# Altium PCB HItachi (unroute).PcbDoc
Units mm, origin at the board's own origin, x right, y up, seen from the top; angles counter-clockwise.
Board outline 140 x 102 mm, 4 copper layers (TOP, GND, POWER, BOT), stack 0.778 mm thick; 39 components, 47 nets, 150 pads, 0 vias.
Unrouted connection lines stored in the file: 103.
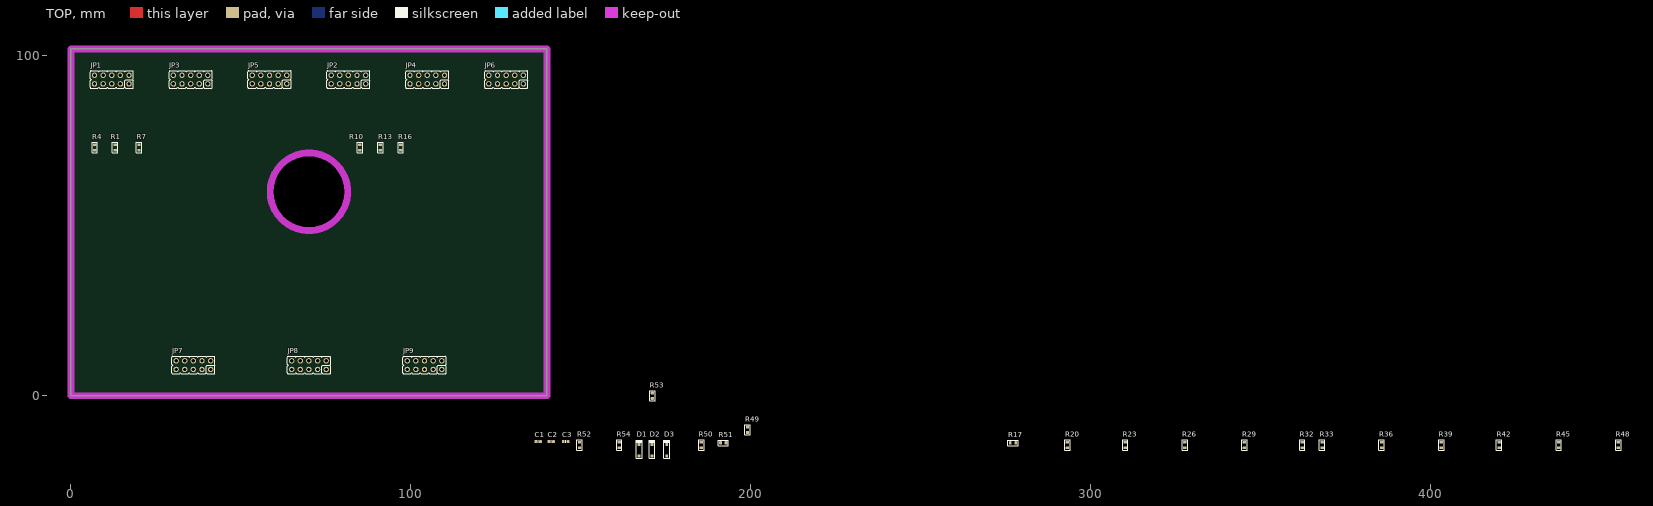
[diagram p0: TOP view]
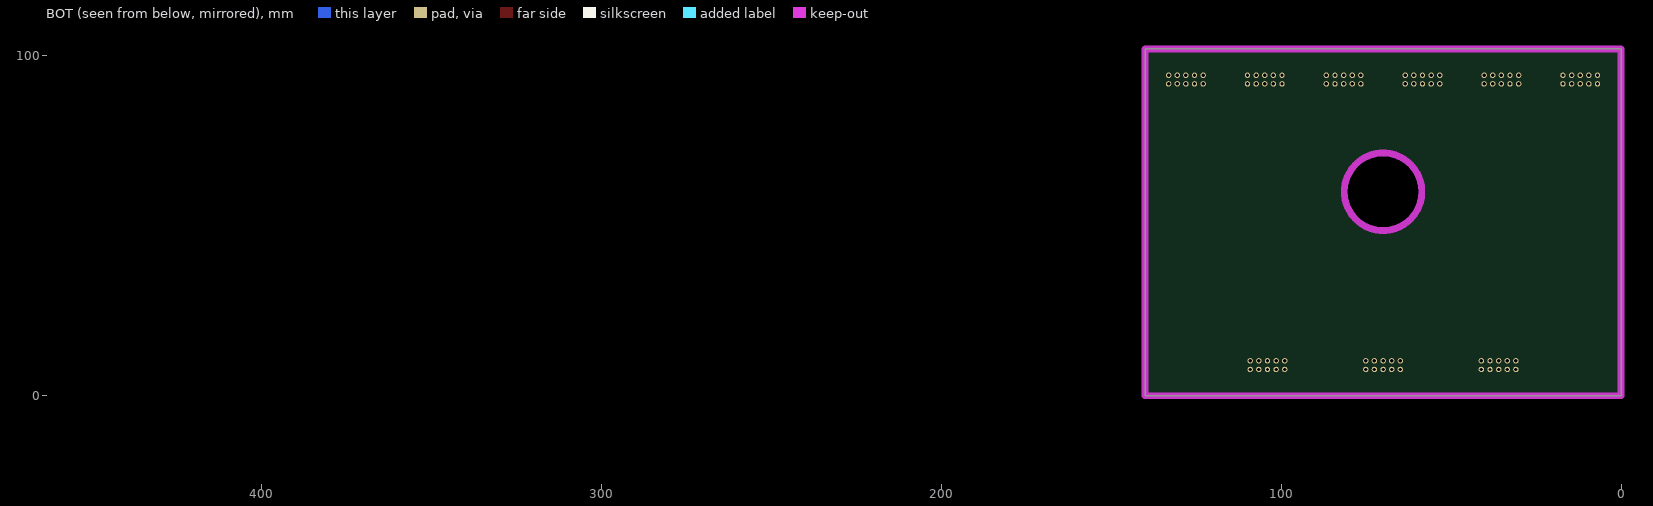
[diagram p1: BOT view, seen from below]
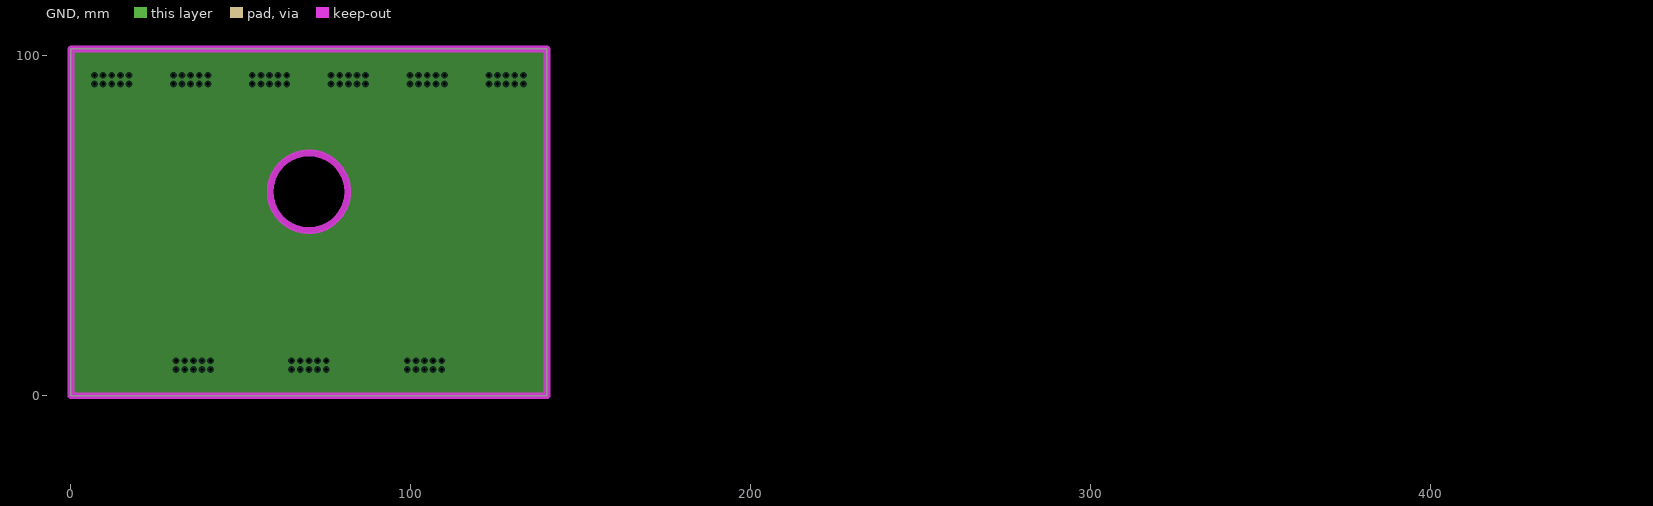
[diagram p2: GND, clearances drawn from the general rule]

## Layer stack, top to bottom
Top Solder: solder mask 0.0102, Solder Resist, Dk 3.5
TOP: signal copper 0.0356
Dielectric 1: core 0.254, FR-4, Dk 4.2
GND: plane copper 0.036
Dielectric 3: prepreg 0.127, Dk 4.2
POWER: signal copper 0.036
Dielectric 2: core 0.254, Dk 4.2
BOT: signal copper 0.0356
Bottom Solder: solder mask 0.0102, Solder Resist, Dk 3.5

## Board outline
0,0 0,102 140,102 140,0
cut-out: 58.598,60 ccw(c70,60) 70,48.598 ccw(c70,60) 81.402,60 ccw(c70,60) 70,71.402 ccw(c70,60)

## Design rules (kind name [scope] priority, off if disabled: settings)
Clearance [All] p1: gap=0.254 ignorepadtopadclearanceinfootprint=FALSE except(0: Arc-Hole Track-Hole SMDPad-Hole THPad-Hole Via-Hole Fill-Hole Poly-Hole Region-Hole Text-Hole)
MatchedLengths [All] p1: tolerance=2 checknetsindiffpair=FALSE checkdiffpairvsdiffpair=TRUE checkxsignals=TRUE checkothers=TRUE
PlaneClearance [All] p1: clearance=0.508
PlaneConnect [All] p1: planeconnectstyle=Relief reliefexpansion=0.508 reliefentries=4 reliefconductorwidth=0.254 reliefairgap=0.254
PolygonConnect [All] p1: connectstyle=Relief reliefconductorwidth=0.254 reliefentries=4 polygonreliefangle="90 Angle" airgapwidth=0.254
RoutingVias [All] p1: holewidth=0.711 width=1.27 viastyle="Through Hole" minholewidth=0.711 minwidth=1.27 maxholewidth=0.711 maxwidth=1.27
SolderMaskExpansion [All] p1: expansion=0.102 istentingtop=FALSE
Width [All] p1: maxlimit=0.5 minlimit=0.3 preferedwidth=0.3
28 further rules are at their usual default settings.

## Classes and differential pairs
net class NETPxx: P11 P12 P14 P15 P17 P18 P21 P22 P24 P25 P27 P28 P31 P32 P34 P35 P37 P38

## Components (designator, comment, footprint, x,y, rotation, side; value= is the part's Value field where it differs from the comment)
C1 "5AK102KABAA" C0603 137.406,-13.503 r0 top
C2 "5AK102KABAA" C0603 141.216,-13.503 r0 top
C3 "5AK102KABAA" C0603 145.534,-13.503 r0 top
D1 "1N4148_SMD" 1N4148W_V_SMD 167.124,-16.043 r90 top
D2 "1N4148_SMD" 1N4148W_V_SMD 170.934,-16.043 r90 top
D3 "1N4148_SMD" 1N4148W_V_SMD 175.252,-16.043 r90 top
JP1 "SIGNAL OUT 1" HeaderSP_5x2 12,93 r180 top
JP2 "SIGNAL OUT 2" HeaderSP_5x2 81.6,93 r180 top
JP3 "SIGNAL OUT 3" HeaderSP_5x2 35.2,93 r180 top
JP4 "SIGNAL OUT 4" HeaderSP_5x2 104.8,93 r180 top
JP5 "SIGNAL OUT 5" HeaderSP_5x2 58.4,93 r180 top
JP6 "SIGNAL OUT 6" HeaderSP_5x2 128,93 r180 top
JP7 "SIGNAL IN 1" HeaderSP_5x2 36,9 r180 top
JP8 "SIGNAL IN 2" HeaderSP_5x2 70,9 r180 top
JP9 "SIGNAL IN 3" HeaderSP_5x2 104,9 r180 top
R1 "CF1/4W1KJ25" "RM06JTN (0603)" 13,73 r90 top
R4 "CF1/4W1KJ25" "RM06JTN (0603)" 7,73 r90 top
R7 "CF1/4W1KJ25" "RM06JTN (0603)" 20,73 r90 top
R10 "CF1/4W1KJ25" "RM06JTN (0603)" 85,73 r90 top
R13 "CF1/4W1KJ25" "RM06JTN (0603)" 91,73 r90 top
R16 "CF1/4W1KJ25" "RM06JTN (0603)" 97,73 r90 top
R17 "CF1/4W1KJ25" "RM06JTN (0603)" 277.106,-13.884 r0 top
R20 "CF1/4W1KJ25" "RM06JTN (0603)" 293.108,-14.519 r90 top
R23 "CF1/4W1KJ25" "RM06JTN (0603)" 310.126,-14.519 r90 top
R26 "CF1/4W1KJ25" "RM06JTN (0603)" 327.652,-14.519 r90 top
R29 "CF1/4W1KJ25" "RM06JTN (0603)" 345.178,-14.519 r90 top
R32 "CF1/4W1KJ25" "RM06JTN (0603)" 362.196,-14.519 r90 top
R33 "CF1/4W1KJ25" "RM06JTN (0603)" 368.038,-14.519 r90 top
R36 "CF1/4W1KJ25" "RM06JTN (0603)" 385.564,-14.519 r90 top
R39 "CF1/4W1KJ25" "RM06JTN (0603)" 403.09,-14.519 r90 top
R42 "CF1/4W1KJ25" "RM06JTN (0603)" 420.108,-14.519 r90 top
R45 "CF1/4W1KJ25" "RM06JTN (0603)" 437.634,-14.519 r90 top
R48 "CF1/4W1KJ25" "RM06JTN (0603)" 455.16,-14.519 r90 top
R49 "CF1/4W1KJ25" "RM06JTN (0603)" 199,-10 r90 top
R50 "CF1/4W1KJ25" "RM06JTN (0603)" 185.412,-14.519 r90 top
R51 "CF1/4W1KJ25" "RM06JTN (0603)" 191.889,-13.884 r0 top
R52 "CF1/4W1KJ25" "RM06JTN (0603)" 149.598,-14.519 r90 top
R53 "CF1/4W1KJ25" "RM06JTN (0603)" 171,0 r90 top
R54 "CF1/4W1KJ25" "RM06JTN (0603)" 161.282,-14.519 r90 top

## Footprints (in the part's own frame and the unit in brackets; to place one, negate y for a bottom-side part, rotate by r counter-clockwise, add the part's x,y. Pads: shape width x height; smd on the part's side, far side on the other; paste and mask are expansions set on the pad)
1N4148W_V_SMD [mm] "SOD-123"
  rrect20% 0.85x0.85 smd mask+0.1: 1(-1.675,0) 2(1.675,0)
  silkscreen extent -2.4,-0.85 3,0.85, body extent -1.85,-0.8 1.85,0.8, height 1.27
C0603 [mm] "Chip Capacitor, Body 1.6x0.8mm, 1608"
  rrect50% 0.8x0.9 smd: 1(-0.7,0) 2(0.7,0)
  silkscreen extent 0,-0.4 0,0.4, body extent -0.8,-0.4 0.8,0.4, height 0.6
HeaderSP_5x2 [mm] "Connector DIP FeMale, 2x5Pin_2.54mm"
  round 1.6 hole 1 mask+0.1: 1(-5.08,1.27) 2(-2.54,1.27) 3(0,1.27) 4(2.54,1.27) 5(5.08,1.27) 6(-5.08,-1.27) 7(-2.54,-1.27) 8(0,-1.27) 9(2.54,-1.27) 10(5.08,-1.27)
  silkscreen extent -6.35,-2.55 6.35,2.55
"RM06JTN (0603)" [mm] "RESISTOR_1/10W_SMD"
  rrect50% 0.8x1 smd mask+0.1: 1(-0.8,0) 2(0.8,0)
  silkscreen extent -1.5,-0.8 1.5,0.8, body extent -0.8,-0.41 0.8,0.41, height 0.45

## Part data
C1 C2 C3: "CAP NPO CAPNTO 1nF 100V 10%"
D1 D2 D3: "Diode HS 500mA 100V SOD123"
JP1 JP2 JP3 JP4 JP5 JP6 JP7 JP8 JP9: library part Con10, "Connector 10"
R1 R4 R7 R10 R13 R16 R17 R20 R23 R26 R29 R32 R33 R36 R39 R42 R45 R48 R49 R50 R51 R52 R53 R54: "RES CF AXIAL-0.3 5% 1/4W 1K"

## Nets (pads, with @x,y where several pads share a name; then routed paths per layer and width w, separated by ;. In a path a pad name is that pad's centre, name@x,y a point inside that pad or via, vN(x,y) a via of type N, cw(c..) or ccw(c..) an arc to the next point about the centre after c; other vN are vias at no path point)
7.2V: C1.1 C2.1 C3.1 JP2.1 JP4.1 JP6.1 JP7.10 JP8.10 JP9.10 R52.1 R53.1 R54.1
GND: JP1.3 JP1.4 JP1.6 JP1.7 JP1.9 JP1.10 JP2.2 JP2.4 JP2.5 JP2.7 JP2.8 JP2.10 JP3.3 JP3.4 JP3.6 JP3.7 JP3.9 JP3.10 JP4.2 JP4.4 JP4.5 JP4.7 JP4.8 JP4.10 JP5.3 JP5.4 JP5.6 JP5.7 JP5.9 JP5.10 JP6.2 JP6.4 JP6.5 JP6.7 JP6.8 JP6.10 JP7.1 JP7.4 JP7.7 JP8.1 JP8.4 JP8.7 JP9.1 JP9.4 JP9.7
NetC1_2: C1.2 D1.2
NetC2_2: C2.2 D2.2
NetC3_2: C3.2 D3.2
NetD1_1: D1.1 R49.1 R52.2
NetD2_1: D2.1 R50.1 R53.2
NetD3_1: D3.1 R51.1 R54.2
NetJP1_1: JP1.1 R49.2
NetJP1_2: JP1.2 R1.2
NetJP1_5: JP1.5 R4.2
NetJP1_8: JP1.8 R7.2
NetJP2_3: JP2.3 R10.2
NetJP2_6: JP2.6 R13.2
NetJP2_9: JP2.9 R16.2
NetJP3_1: JP3.1 R50.2
NetJP3_2: JP3.2 R17.2
NetJP3_5: JP3.5 R20.2
NetJP3_8: JP3.8 R23.2
NetJP4_3: JP4.3 R26.2
NetJP4_6: JP4.6 R29.2
NetJP4_9: JP4.9 R32.2
NetJP5_1: JP5.1 R51.2
NetJP5_2: JP5.2 R33.2
NetJP5_5: JP5.5 R36.2
NetJP5_8: JP5.8 R39.2
NetJP6_3: JP6.3 R42.2
NetJP6_6: JP6.6 R45.2
NetJP6_9: JP6.9 R48.2
P11: JP7.9 R1.1
P12: JP7.8 R10.1
P14: JP7.6 R4.1
P15: JP7.5 R13.1
P17: JP7.3 R7.1
P18: JP7.2 R16.1
P21: JP8.9 R17.1
P22: JP8.8 R26.1
P24: JP8.6 R20.1
P25: JP8.5 R29.1
P27: JP8.3 R23.1
P28: JP8.2 R32.1
P31: JP9.9 R33.1
P32: JP9.8 R42.1
P34: JP9.6 R36.1
P35: JP9.5 R45.1
P37: JP9.3 R39.1
P38: JP9.2 R48.1

## Polygon pours and split planes (outlines as drawn)
no net on GND (split plane): 139.49,0.51 0.51,0.51 0.51,101.49 139.49,101.49

## Keep-outs
Keep-Out Layer:
  circle w2: c70,60 r11.402
  lines w2: 0,0 140,0 140,102 0,102 0,0

## Dimensions
70,60 to 69.596,59.436 on Mechanical 10
70,71.402 to 0,102 on Mechanical 10
58.598,60 to 0,102 on Mechanical 10
0,102 to 140,102 on Mechanical 10
0,102 to 0,0 on Mechanical 10
0,102 to 6.92,94.27 on Mechanical 10
140,102 to 133.08,94.27 on Mechanical 10
0,102 to 6.92,94.27 on Mechanical 10
140,102 to 133.08,94.27 on Mechanical 10
0,0 to 30.92,7.73 on Mechanical 10
0,0 to 30.92,7.73 on Mechanical 10
109.08,7.73 to 140,0 on Mechanical 10
109.08,7.73 to 140,0 on Mechanical 10

## Text inside footprints (layer, text, board x,y; h text height)
C1: Mechanical 1 "C?" at 137.406,-13.503 h0.5
C2: Mechanical 1 "C?" at 141.216,-13.503 h0.5
C3: Mechanical 1 "C?" at 145.534,-13.503 h0.5
JP1: Mechanical 1 "1" at 17.25,92.13 h1.2 r180; Mechanical 1 "5" at 7.2,92.1 h1.2 r180; Mechanical 1 "10" at 7.45,94.67 h1.2 r180; Mechanical 1 "6" at 17.25,94.67 h1.2 r180
JP2: Mechanical 1 "1" at 86.85,92.13 h1.2 r180; Mechanical 1 "5" at 76.8,92.1 h1.2 r180; Mechanical 1 "10" at 77.05,94.67 h1.2 r180; Mechanical 1 "6" at 86.85,94.67 h1.2 r180
JP3: Mechanical 1 "1" at 40.45,92.13 h1.2 r180; Mechanical 1 "5" at 30.4,92.1 h1.2 r180; Mechanical 1 "10" at 30.65,94.67 h1.2 r180; Mechanical 1 "6" at 40.45,94.67 h1.2 r180
JP4: Mechanical 1 "1" at 110.05,92.13 h1.2 r180; Mechanical 1 "5" at 100,92.1 h1.2 r180; Mechanical 1 "10" at 100.25,94.67 h1.2 r180; Mechanical 1 "6" at 110.05,94.67 h1.2 r180
JP5: Mechanical 1 "1" at 63.65,92.13 h1.2 r180; Mechanical 1 "5" at 53.6,92.1 h1.2 r180; Mechanical 1 "10" at 53.85,94.67 h1.2 r180; Mechanical 1 "6" at 63.65,94.67 h1.2 r180
JP6: Mechanical 1 "1" at 133.25,92.13 h1.2 r180; Mechanical 1 "5" at 123.2,92.1 h1.2 r180; Mechanical 1 "10" at 123.45,94.67 h1.2 r180; Mechanical 1 "6" at 133.25,94.67 h1.2 r180
JP7: Mechanical 1 "1" at 41.25,8.13 h1.2 r180; Mechanical 1 "5" at 31.2,8.1 h1.2 r180; Mechanical 1 "10" at 31.45,10.67 h1.2 r180; Mechanical 1 "6" at 41.25,10.67 h1.2 r180
JP8: Mechanical 1 "1" at 75.25,8.13 h1.2 r180; Mechanical 1 "5" at 65.2,8.1 h1.2 r180; Mechanical 1 "10" at 65.45,10.67 h1.2 r180; Mechanical 1 "6" at 75.25,10.67 h1.2 r180
JP9: Mechanical 1 "1" at 109.25,8.13 h1.2 r180; Mechanical 1 "5" at 99.2,8.1 h1.2 r180; Mechanical 1 "10" at 99.45,10.67 h1.2 r180; Mechanical 1 "6" at 109.25,10.67 h1.2 r180
R1: Mechanical 1 "R?" at 13,73 h0.5 r90
R4: Mechanical 1 "R?" at 7,73 h0.5 r90
R7: Mechanical 1 "R?" at 20,73 h0.5 r90
R10: Mechanical 1 "R?" at 85,73 h0.5 r90
R13: Mechanical 1 "R?" at 91,73 h0.5 r90
R16: Mechanical 1 "R?" at 97,73 h0.5 r90
R17: Mechanical 1 "R?" at 277.106,-13.884 h0.5
R20: Mechanical 1 "R?" at 293.108,-14.519 h0.5 r90
R23: Mechanical 1 "R?" at 310.126,-14.519 h0.5 r90
R26: Mechanical 1 "R?" at 327.652,-14.519 h0.5 r90
R29: Mechanical 1 "R?" at 345.178,-14.519 h0.5 r90
R32: Mechanical 1 "R?" at 362.196,-14.519 h0.5 r90
R33: Mechanical 1 "R?" at 368.038,-14.519 h0.5 r90
R36: Mechanical 1 "R?" at 385.564,-14.519 h0.5 r90
R39: Mechanical 1 "R?" at 403.09,-14.519 h0.5 r90
R42: Mechanical 1 "R?" at 420.108,-14.519 h0.5 r90
R45: Mechanical 1 "R?" at 437.634,-14.519 h0.5 r90
R48: Mechanical 1 "R?" at 455.16,-14.519 h0.5 r90
R49: Mechanical 1 "R?" at 199,-10 h0.5 r90
R50: Mechanical 1 "R?" at 185.412,-14.519 h0.5 r90
R51: Mechanical 1 "R?" at 191.889,-13.884 h0.5
R52: Mechanical 1 "R?" at 149.598,-14.519 h0.5 r90
R53: Mechanical 1 "R?" at 171,0 h0.5 r90
R54: Mechanical 1 "R?" at 161.282,-14.519 h0.5 r90